# Altium PCB Adapter SMD.PcbDoc
Units mm, origin at the board's own origin, x right, y up, seen from the top; angles counter-clockwise.
Board outline 65.5 x 40.5 mm, 2 copper layers (Top Layer, Bottom Layer), stack 0.325 mm thick; 10 components, 24 nets, 82 pads, 4 vias.
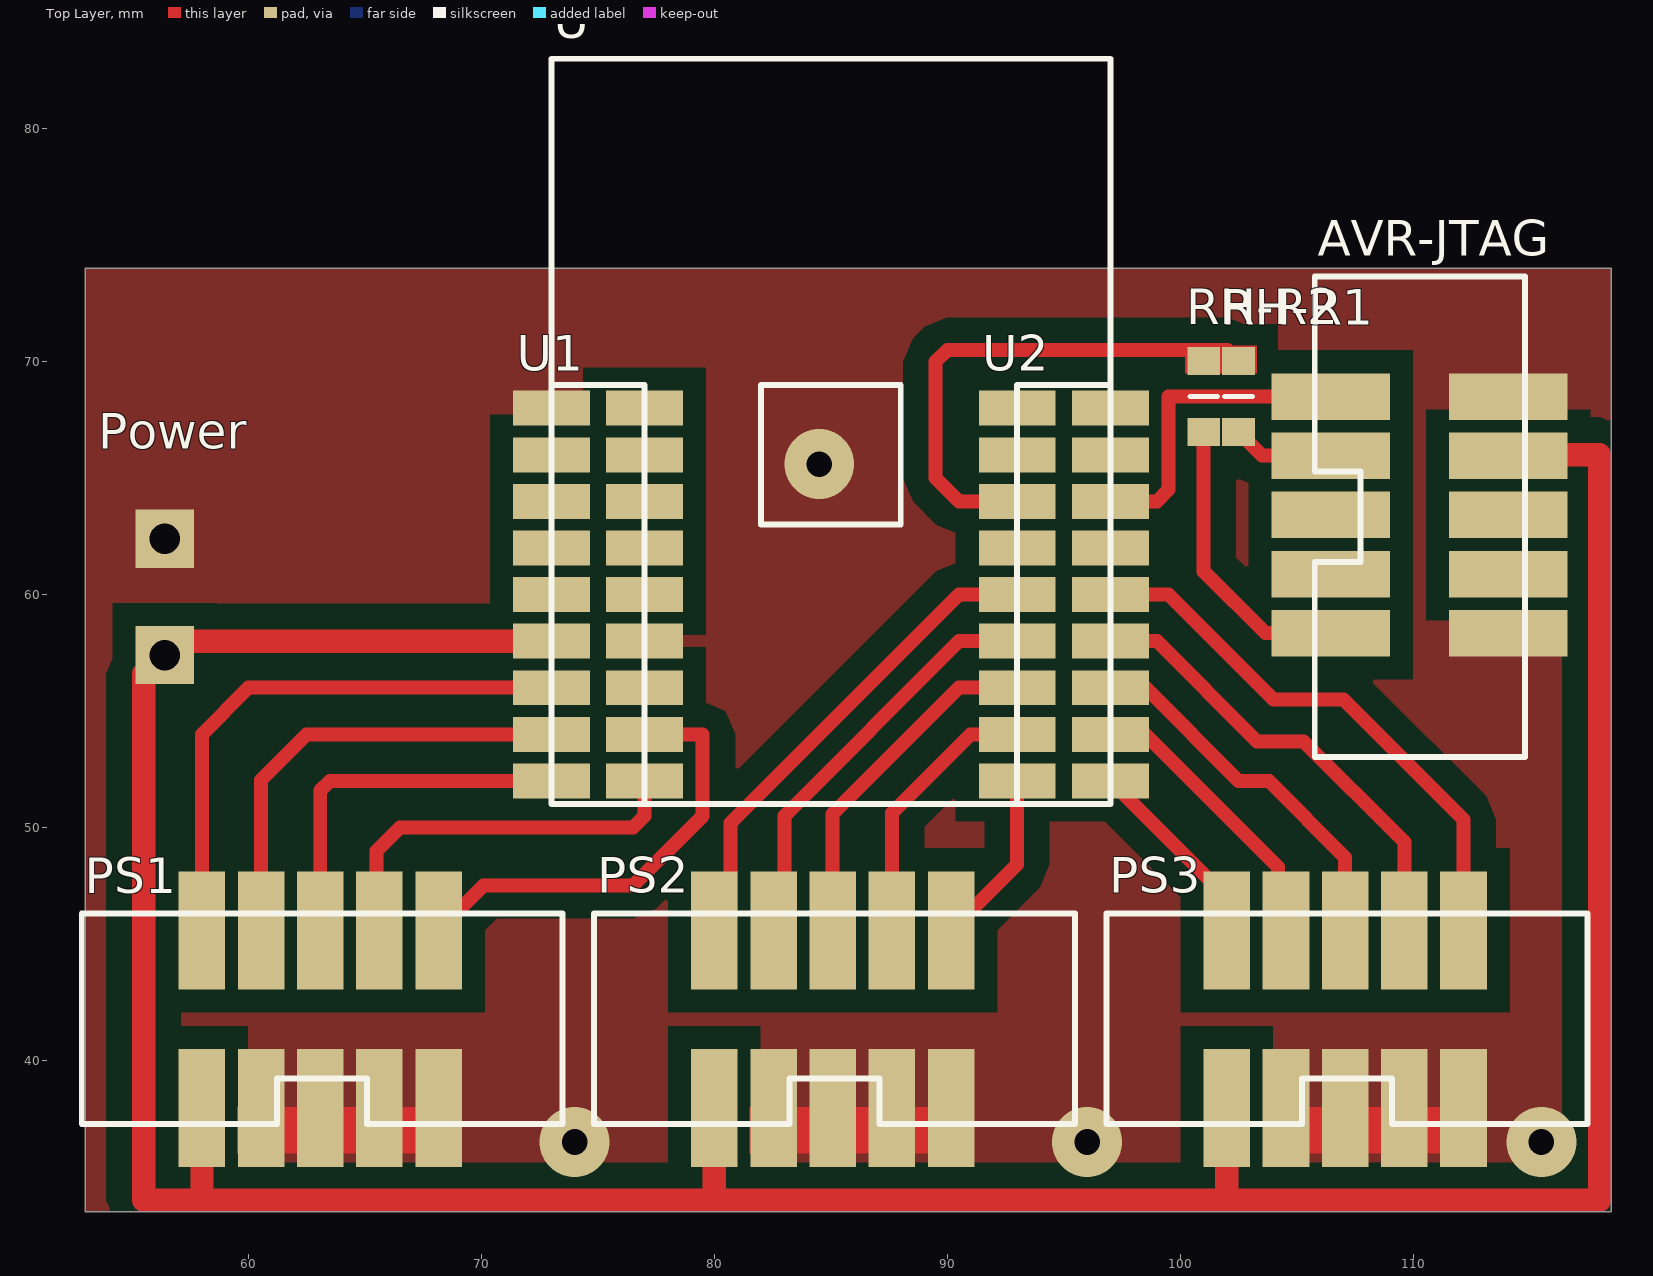
[diagram p0: Top Layer view]
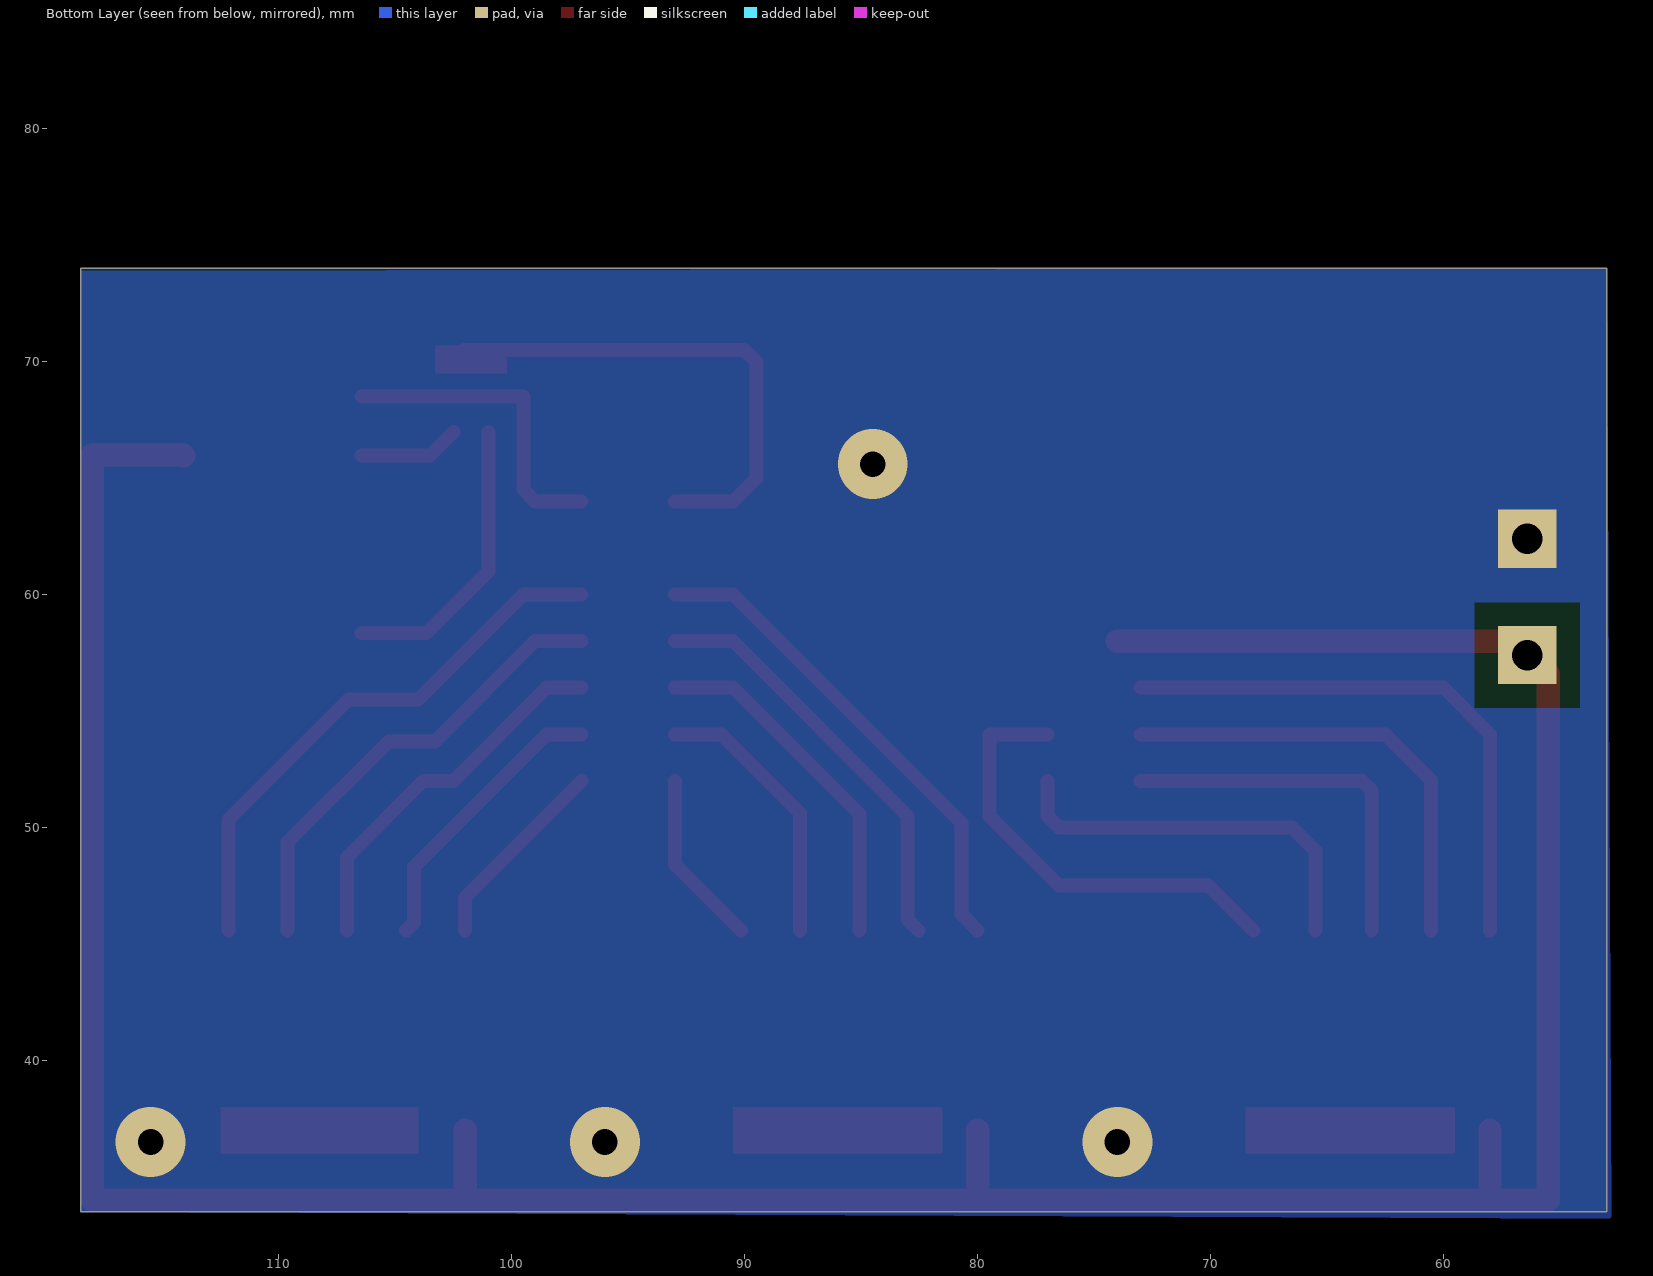
[diagram p1: Bottom Layer view, seen from below]
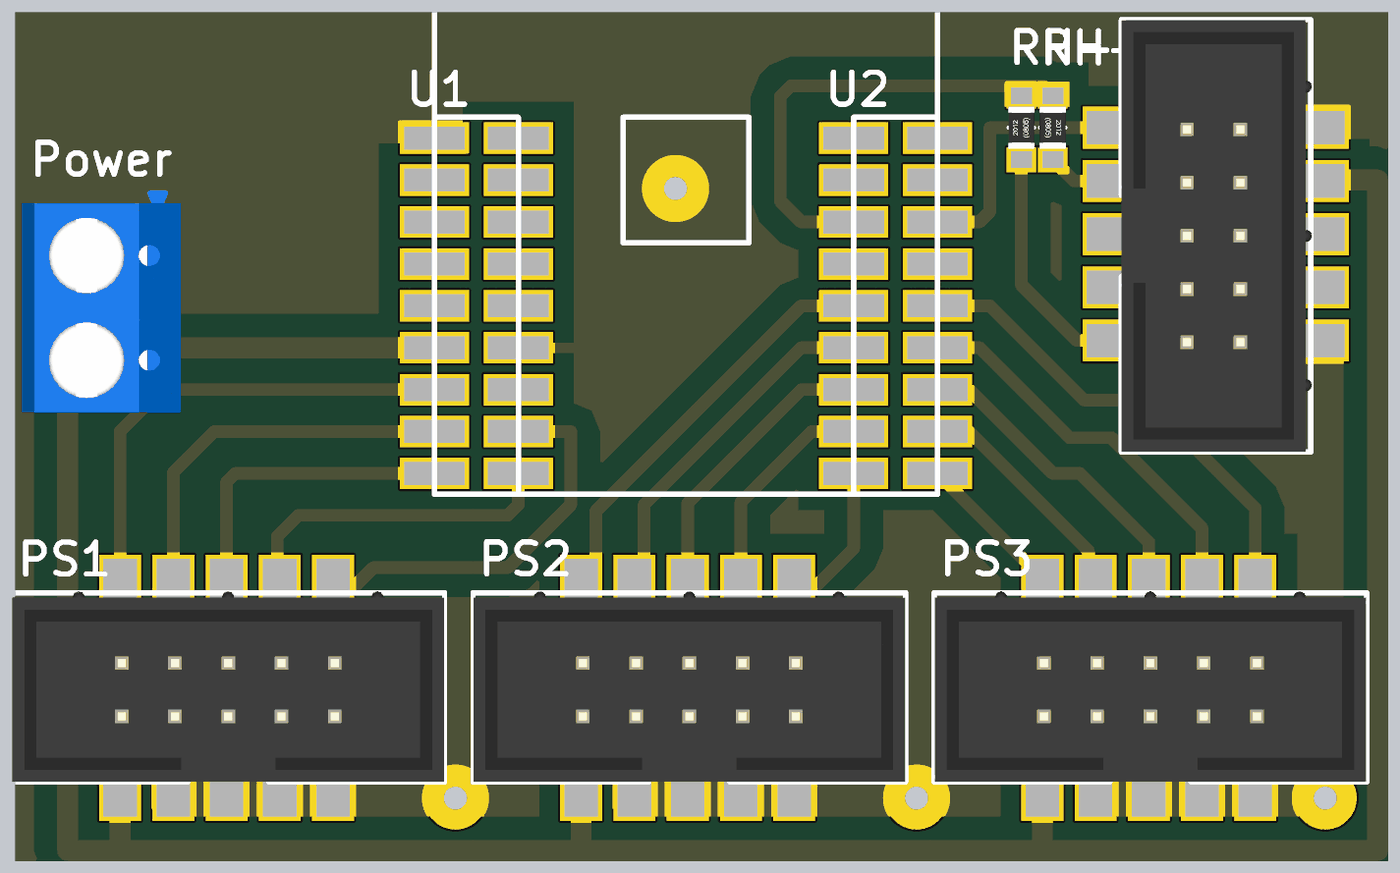
[diagram p2: 3D render of the assembled board from above, using the file's embedded part models]

## Layer stack, top to bottom
Top Layer: signal copper 0.0356
Dielectric 1: core 0.254, FR-4, Dk 4.2
Bottom Layer: signal copper 0.0356

## Board outline
53,33.5 118.5,33.5 118.5,74 53,74

## Design rules (kind name [scope] priority, off if disabled: settings)
Clearance "Polygon Clearance" [InNet('GND')] p1: gap=1
PasteMaskExpansion [All] p1: expansion=-0.2
PolygonConnect [All] p1: connectstyle=Direct reliefconductorwidth=0.254 reliefentries=4 polygonreliefangle="90 Angle" airgapwidth=0.254
RoutingVias [All] p1: holewidth=0.711 width=1.27 viastyle="Through Hole" minholewidth=0.711 minwidth=1.27 maxholewidth=0.711 maxwidth=1.27
SolderMaskExpansion [All] p1: expansion=0.102
Width [All] p1: maxlimit=0.254 minlimit=0.254 preferedwidth=0.254
29 further rules are at their usual default settings.

## Classes and differential pairs
component class "AVR Debugger Port": AVR-JTAG RH-R1 RH-R2
component class Top: LED1 LED2 Power PS1 PS2 PS3 U1 U2 U*

## Components (designator, comment, footprint, x,y, rotation, side; value= is the part's Value field where it differs from the comment)
AVR-JTAG "AVR Style" "Header 2x5 IDC SMT" 109,68.5 r0 top
Power "Header 2x1" "Screw terminal 2 pin RM 5mm" 56.4,62.4 r270 top
PS1 "Header 2x5" "Header 2x5 IDC SMT" 58,40.5 r90 top
PS2 "Header 2x5" "Header 2x5 IDC SMT" 80,40.5 r90 top
PS3 "Header 2x5" "Header 2x5 IDC SMT" 102,40.5 r90 top
RH-R1 "430R" "R 0805 / 2012 wide" 102.5,68.5 r270 top
RH-R2 "430R" "R 0805 / 2012 wide" 101,68.5 r90 top
U1 "Core51822 left" "Header 2.00 2x9 SMD" 75,60 r0 top
U2 "Core51822 right" "Header 2.00 2x9 SMD" 95,60 r0 top
U* "Core51822" "Core51822 Layout" 73,51 r0 top

## Footprints (in the part's own frame and the unit in brackets; to place one, negate y for a bottom-side part, rotate by r counter-clockwise, add the part's x,y. Pads: shape width x height; smd on the part's side, far side on the other; paste and mask are expansions set on the pad)
"Core51822 Layout" [mm]
  silkscreen extent 0,0 24,32
"Header 2.00 2x9 SMD" [mm]
  rect 3.3x1.5 smd: 1(-2,8) 2(2,8) 3(-2,6) 4(2,6) 5(-2,4) 6(2,4) 7(-2,2) 8(2,2) 9(-2,0) 10(2,0) 11(-2,-2) 12(2,-2) 13(-2,-4) 14(2,-4) 15(-2,-6) 16(2,-6) 17(-2,-8) 18(2,-8)
"Header 2x5 IDC SMT" [mm]
  rect 5.08x2 smd: 1(-2.54,0) 2(5.08,0) 3(-2.54,-2.54) 4(5.08,-2.54) 5(-2.54,-5.08) 6(5.08,-5.08) 7(-2.54,-7.62) 8(5.08,-7.62) 9(-2.54,-10.16) 10(5.08,-10.16)
  silkscreen extent -3.22,-15.48 5.8,5.16, body extent -3.22,-15.46 5.88,5.14, height 9.3
"R 0805 / 2012 wide" [mm] "Resistor 0805 / 2012 (2.0 x 1.2 mm)"
  rect 1.2x1.4 smd: 1(-1.524,0) 2(1.524,0)
  silkscreen extent 0,-0.6 0,0.6, body extent -1,-0.62 1,0.62, height 0.45
"Screw terminal 2 pin RM 5mm" [mm] "DG301-5.0-02"
  rect 2.5x2.5 hole 1.3: 1(0,0) 2(5,0)
  body extent -3.1,-3.1 7.5,4.5, height 10

## Part data
AVR-JTAG: library part "Header JTAG AVR"
RH-R1 RH-R2: library part Resistor

## Via types
v1: diameter 3, hole 1.1, Top Layer to Bottom Layer, 4 vias

## Nets (pads, with @x,y where several pads share a name; then routed paths per layer and width w, separated by ;. In a path a pad name is that pad's centre, name@x,y a point inside that pad or via, vN(x,y) a via of type N, cw(c..) or ccw(c..) an arc to the next point about the centre after c; other vN are vias at no path point)
3V3: AVR-JTAG.4 Power.2 PS1.1 PS2.1 PS3.1 U1.11 | length 149.1
  Top Layer w1: PS1.1@58,37 58,34 ; U1.11@74,58 56.9,58 55.5,56.6 55.5,34 58,34 ; PS2.1@80,37 80,34 ; PS3.1@102,37 102,34 ; AVR-JTAG.4 114.12,66 118,66 118,34 102,34 ; 58,34 80,34 ; 80,34 102,34
GND: AVR-JTAG.2 AVR-JTAG.10 Power.1 PS1.3 PS1.5 PS1.7 PS1.9 PS2.3 PS2.5 PS2.7 PS2.9 PS3.3 PS3.5 PS3.7 PS3.9 U1.1 U1.12
  other v1: 74,36.5 96,36.5 115.5,36.5 84.5,65.6
MISO: U1.9
MOSI: U1.5
SCLK: U1.3
SENSOR1: PS1.2 U1.13 | length 24.2
  Top Layer w0.6: PS1.2 58,54 60,56 U1.13
SENSOR2: PS1.4 U1.15 | length 19.7
  Top Layer w0.6: PS1.4 60.54,52.04 62.5,54 U1.15
SENSOR3: PS1.6 U1.17 | length 16.1
  Top Layer w0.6: PS1.6 63.08,51.58 63.5,52 U1.17
SENSOR4: PS1.8 U1.18 | length 17
  Top Layer w0.6: PS1.8@65.5,45.58 65.5,49 66.5,50 76.5,50 77,50.5 U1.18
SENSOR5: PS1.10 U1.16 | length 19.4
  Top Layer w0.6: PS1.10 70.08,47.5 76.5,47.5 79.5,50.5 79.5,54 U1.16
SENSOR6: PS2.2 U2.9 | length 21.3
  Top Layer w0.6: PS2.2 80.7,46.28 80.7,50.2 90.5,60 U2.9
SENSOR7: PS2.4 U2.11 | length 18.2
  Top Layer w0.6: PS2.4 83,46.04 83,50.5 90.5,58 U2.11
SENSOR8: PS2.6 U2.13 | length 15.2
  Top Layer w0.6: PS2.6 85.08,50.58 90.5,56 U2.13
SENSOR9: PS2.8 U2.15 | length 11.8
  Top Layer w0.6: PS2.8 87.62,50.62 91,54 U2.15
SENSOR10: PS2.10 U2.17 | length 7.6
  Top Layer w0.6: PS2.10 93,48.42 U2.17
SENSOR11: PS3.2 U2.18 | length 8.5
  Top Layer w0.6: U2.18 102,47 PS3.2
SENSOR12: PS3.4 U2.16 | length 12.4
  Top Layer w0.6: U2.16 98.5,54 104.2,48.3 104.2,45.92 PS3.4
SENSOR13: PS3.6 U2.14 | length 16.2
  Top Layer w0.6: U2.14 98.5,56 102.5,52 103.8,52 107.08,48.72 PS3.6
SENSOR14: PS3.8 U2.12 | length 20
  Top Layer w0.6: U2.12 99,58 103.3,53.7 105.3,53.7 109.62,49.38 PS3.8
SENSOR15: PS3.10 U2.10 | length 23.9
  Top Layer w0.6: U2.10 99.5,60 104,55.5 107,55.5 112.16,50.34 PS3.10
SWDCLK: AVR-JTAG.1 U2.6 | length 13.7
  Top Layer w0.6: U2.6 99,64 99.5,64.5 99.5,68.5 AVR-JTAG.1
SWDIO: RH-R1.1 RH-R2.2 U2.5 | length 22.3
  Top Layer w0.6: U2.5 90.5,64 89.5,65 89.5,70 90,70.5 102.024,70.5 RH-R1.1
TDI: AVR-JTAG.9 RH-R2.1 | length 12.5
  Top Layer w0.6: RH-R2.1 101,61 103.66,58.34 AVR-JTAG.9
TDO: AVR-JTAG.3 RH-R1.2 | length 4.4
  Top Layer w0.6: RH-R1.2 103.516,65.96 AVR-JTAG.3
pads on no net: AVR-JTAG.5 AVR-JTAG.6 AVR-JTAG.7 AVR-JTAG.8 U1.2 U1.4 U1.6 U1.7 U1.8 U1.10 U1.14 U2.1 U2.2 U2.3 U2.4 U2.7 U2.8

## Polygon pours and split planes (outlines as drawn)
GND on Top Layer "GND Plane" (solid, pour order 4): 53,33.5 118.5,33.5 118.5,74 53,74
GND on Bottom Layer "Bottom GND" (solid, pour order 6): 53,74 118.5,73.9 118.5,33.5 52.8,33.2

## Other copper
Top Layer:
  rectangle net GND: 104,36 112.5,38
  rectangle net GND: 59.5,36 68.5,38
  rectangle net GND: 81.5,36 90.5,38
  rectangle net SWDIO: 100.2,69.5 103.3,70.7

## Silkscreen, mask and mechanical layers (free items; w line width, h text height)
Cutting Outside:
  the board outline again, w0.254